# EAGLE board hw-proto01 (EAGLE 7.3.0)
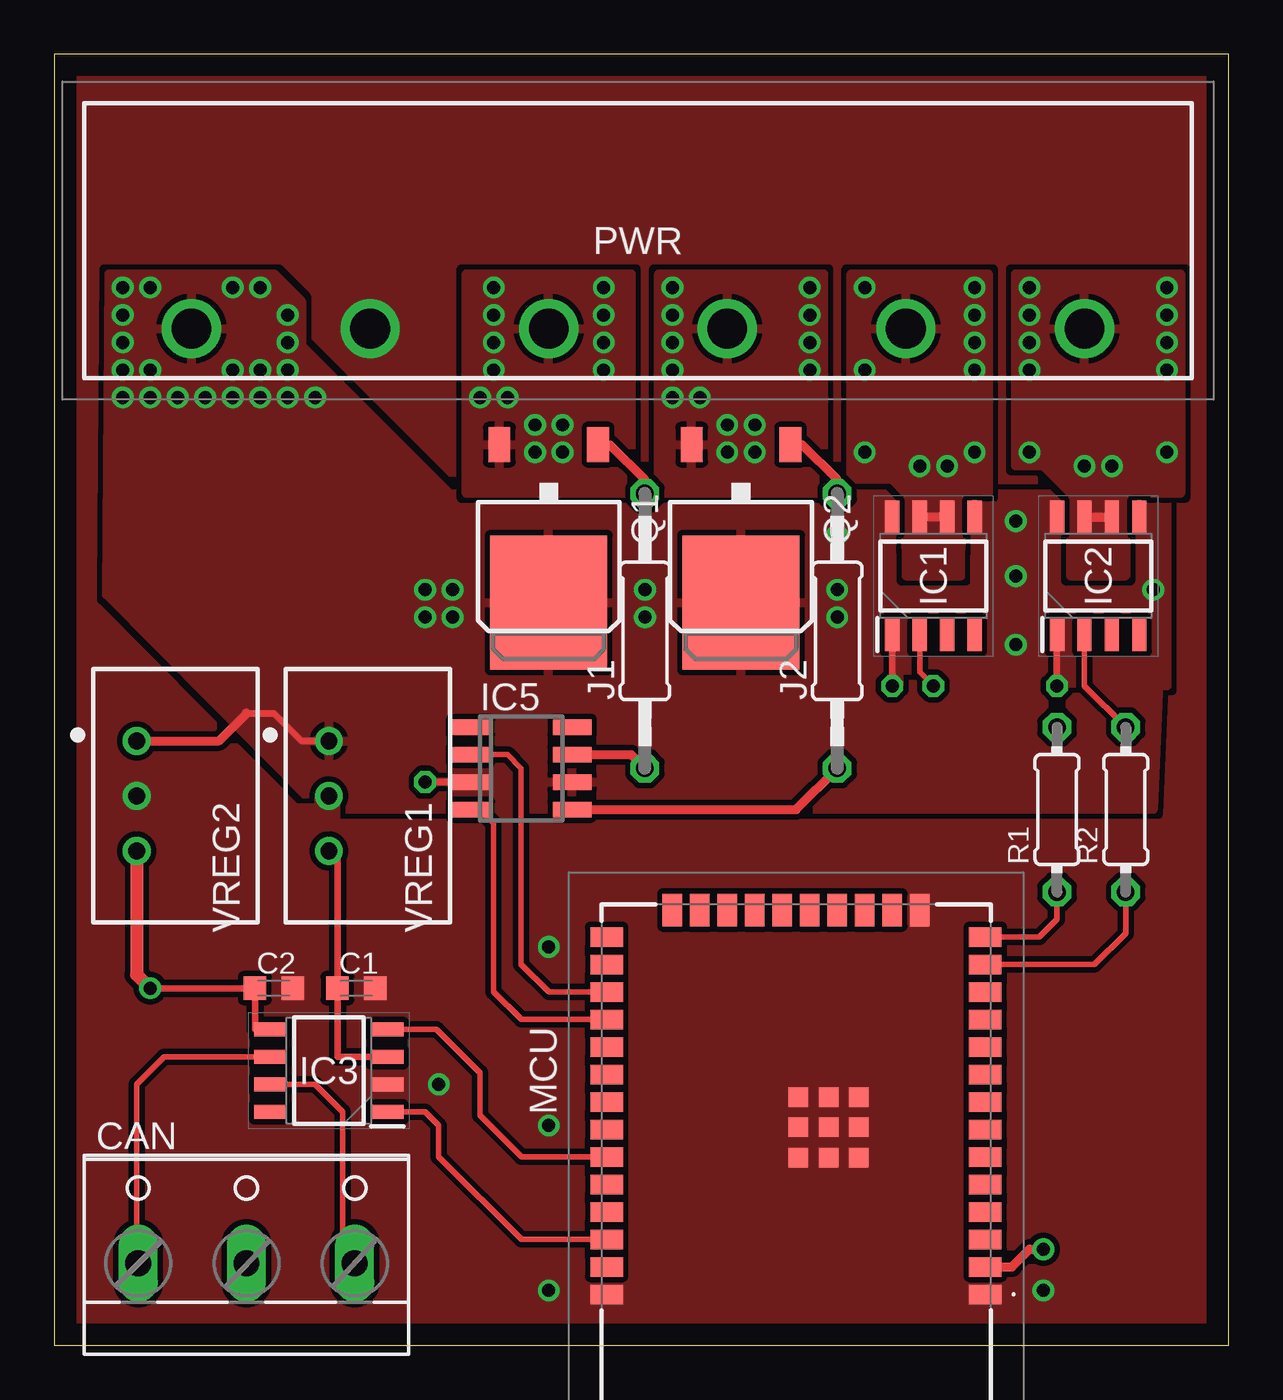
[diagram p0: board, top side]
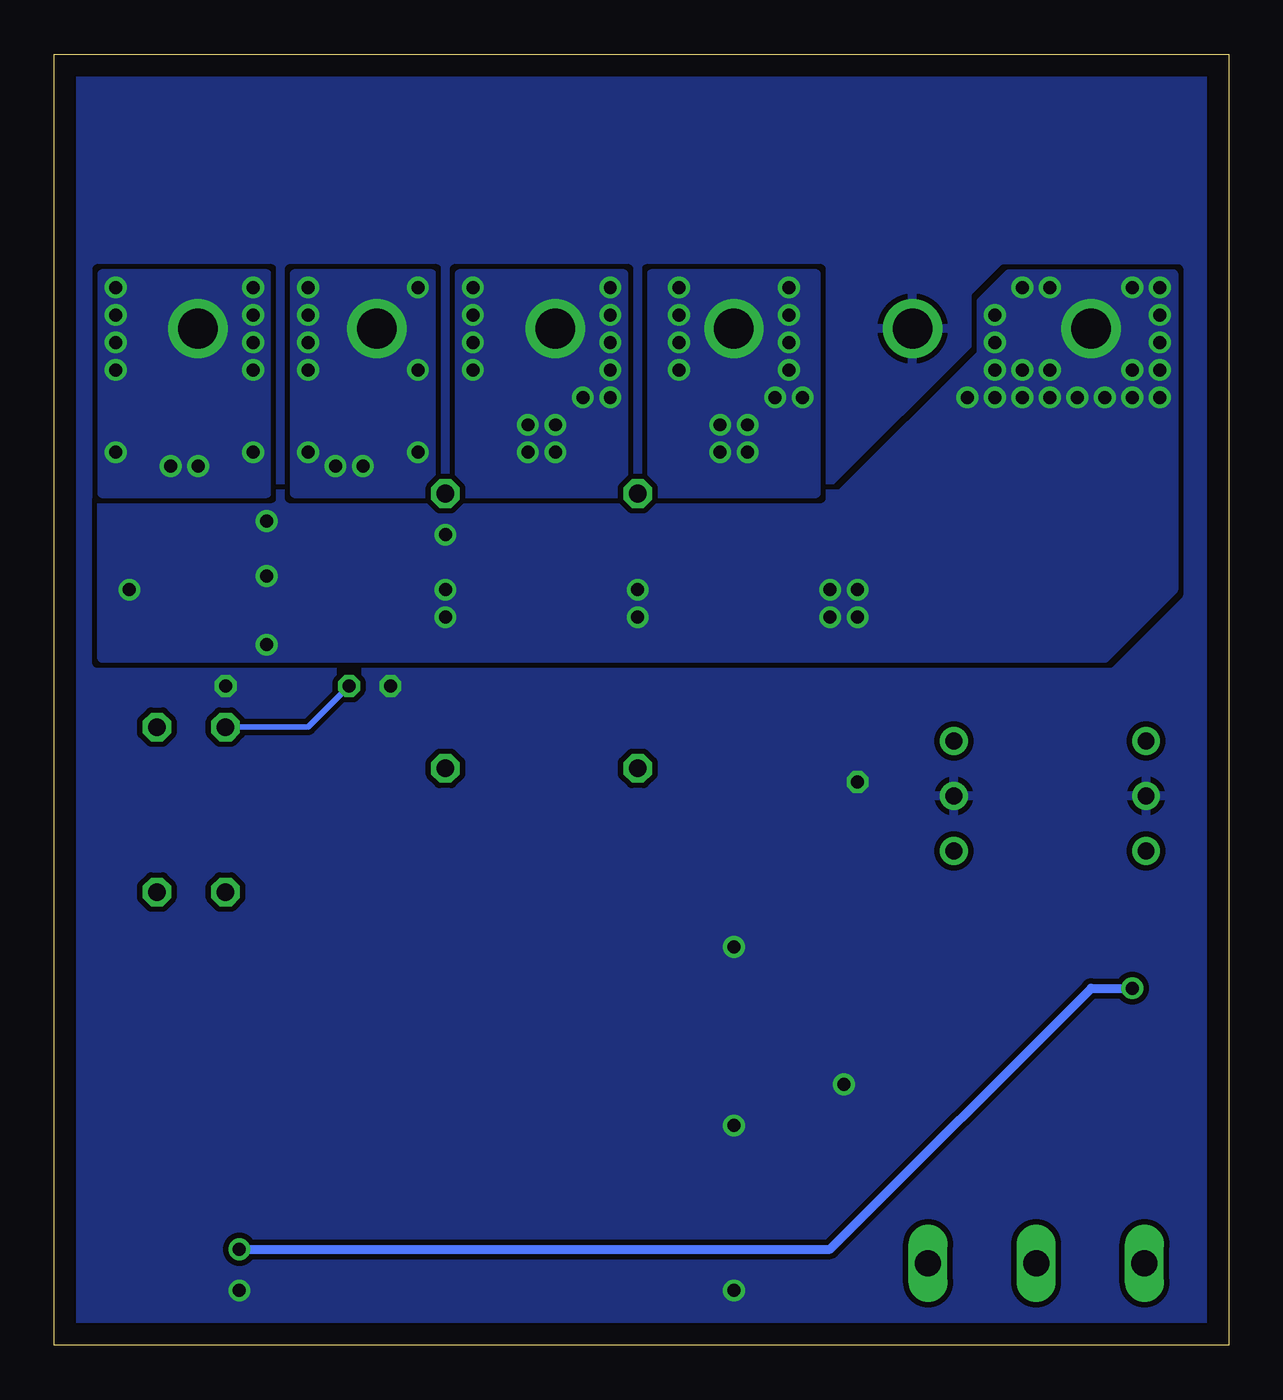
[diagram p1: board, bottom side, seen from below]

Size 54.28 x 59.68 mm. Coordinates in mm from the lower left corner, seen from the top.
Outline: 0,0 54.28,0 54.28,59.68 0,59.68 0,0
Copper layers (1*16): Top 0.035mm / dielectric 1.5mm / Bottom 0.035mm
Design rules "default": minimum track width 10mil, minimum drill 24mil, track to track 8mil, track to pad 8mil, pad to pad 8mil, via to via 8mil, smd to smd 8mil, copper to edge 40mil, drill to drill 8mil, minimum pad ring 10mil, minimum via ring 8mil, stop-mask expansion 4mil, vias tented up to drill 0mil, thermal gap 10mil

## Footprints (pad centres in the part's own frame; a part is rotated, then mirrored left to right if it is on the bottom)
C0603K = smd 1.05 x 1.08: 1 -0.875,0; 2 0.875,0
W237-103 = drill 1.194 long: 1 -5,-1.29; 2 0,-1.29; 3 5,-1.29
SOIC127P600X175-8N = smd 1.525 x 0.65: 1 -2.712,1.905; 2 -2.712,0.635; 3 -2.712,-0.635; 4 -2.712,-1.905; 5 2.712,-1.905; 6 2.712,-0.635; 7 2.712,0.635; 8 2.712,1.905
SOIC127P600X175-8N' = smd 1.5 x 0.65: 1 -2.7,1.905; 2 -2.7,0.635; 3 -2.7,-0.635; 4 -2.7,-1.905; 5 2.7,-1.905; 6 2.7,-0.635; 7 2.7,0.635; 8 2.7,1.905
SO08 = smd 0.72 x 1.78: 1 -1.905,-2.35; 2 -0.635,-2.35; 3 0.635,-2.35; 4 1.905,-2.35; 5 1.905,2.35; 6 0.635,2.35; 7 -0.635,2.35; 8 -1.905,2.35
0207/12 = drill 0.813 octagon: 1 -6.35,0; 2 6.35,0
ESP32WROOM32EN8R2 = smd 1.5 x 0.9: 1 -8.75,5.26; 2 -8.75,3.99; 3 -8.75,2.72; 4 -8.75,1.45; 5 -8.75,0.18; 6 -8.75,-1.09; 7 -8.75,-2.36; 8 -8.75,-3.63; 9 -8.75,-4.9; 10 -8.75,-6.17; 11 -8.75,-7.44; 12 -8.75,-8.71; 13 -8.75,-9.98; 14 -8.75,-11.25; 25 8.75,-11.25; 26 8.75,-9.98; 27 8.75,-8.71; 28 8.75,-7.44; 29 8.75,-6.17; 30 8.75,-4.9; 31 8.75,-3.63; 32 8.75,-2.36; 33 8.75,-1.09; 34 8.75,0.18; 35 8.75,1.45; 36 8.75,2.72; 37 8.75,3.99; 38 8.75,5.26 | smd 0.9 x 1.5: 15 -5.715,-12.5; 16 -4.445,-12.5; 17 -3.175,-12.5; 18 -1.905,-12.5; 19 -0.635,-12.5; 20 0.635,-12.5; 21 1.905,-12.5; 22 3.175,-12.5; 23 4.445,-12.5; 24 5.715,-12.5 | smd 0.9 x 0.9: 39 -1.5,-2.46; 40 -2.9,-2.46; 41 -2.9,-3.86; 42 -1.5,-3.86; 43 -0.1,-3.86; 44 -0.1,-2.46; 45 -0.1,-1.06; 46 -1.5,-1.06; 47 -2.9,-1.06
4DBP10806 = drill 1.829 pad 2.743: 1 0,0; 2 8.255,0; 3 16.51,0; 4 24.765,0; 5 33.02,0; 6 41.275,0
D-PAK_TO252AA = smd 1 x 1.6: 1 -2.28,-4.8; 3 2.28,-4.8 | smd 5.4 x 6.2: 4 0,2.5
0204/7 = drill 0.813 octagon: 1 -3.81,0; 2 3.81,0
TSR-1-2433 = drill 0.78 pad 1.28: 1 -2.54,0; 2 0,0; 3 2.54,0

## Placement (x,y rotation side)
C1  100n  [C0603K]  13.97,16.51 0 top
C2  100n  [C0603K]  10.16,16.51 0 top
CAN  [W237-103]  8.89,5.08 0 top
IC1  VN5E160MSTR-E  [SOIC127P600X175-8N]  40.64,35.56 90 top
IC2  VN5E160MSTR-E  [SOIC127P600X175-8N]  48.26,35.56 90 top
IC3  MCP2562T-H_SN  [SOIC127P600X175-8N']  12.7,12.7 180 top
IC5  IR4427S  [SO08]  21.59,26.67 270 top
J1  000  [0207/12]  27.3,33.02 90 top
J2  000  [0207/12]  36.2,33.02 90 top
MCU  ESP32-WROOM-32E  [ESP32WROOM32EN8R2]  34.29,7.62 180 top
PWR  4DB-P108-06  [4DBP10806]  6.35,46.99 0 top
Q1  PMOS  [D-PAK_TO252AA]  22.86,36.83 180 top
Q2  PMOS  [D-PAK_TO252AA]  31.75,36.83 180 top
R1  10K0  [0204/7]  46.35,24.77 90 top
R2  10K0  [0204/7]  49.53,24.77 90 top
VREG1  +5V  [TSR-1-2433]  12.7,25.4 270 top
VREG2  +3V3  [TSR-1-2433]  3.81,25.4 270 top

## Library data of the parts
C1 C2 J1 J2 R1 R2 = rcl
CAN = con-wago-500; MPN: 237-103; OC_FARNELL: unknown; OC_NEWARK: 18M7116
IC1 IC2 = VN5E160MSTR-E; DESCRIPTION: Gate Drivers SNGL CH HI-SIDE DRVR W/ANALOG CRRNT SNSE; HEIGHT: 1.75mm; MANUFACTURER_NAME: STMicroelectronics; MANUFACTURER_PART_NUMBER: VN5E160MSTR-E; MOUSER_PART_NUMBER: 511-VN5E160MSTR-E; MOUSER_PRICE-STOCK: https://www.mouser.co.uk/ProductDetail/STMicroelectronics/VN5E160MSTR-E?qs=WSSg0AwdCh77XxtxsYEeyw%3D%3D
IC3 = MCP2562T-H_SN; DESCRIPTION: CAN Interface IC; HEIGHT: 1.75mm; MANUFACTURER_NAME: Microchip; MANUFACTURER_PART_NUMBER: MCP2562T-H/SN; MOUSER_PART_NUMBER: 579-MCP2562T-H/SN; MOUSER_PRICE-STOCK: https://www.mouser.co.uk/ProductDetail/Microchip-Technology/MCP2562T-H-SN?qs=eTPcRhULBzwloCb8Xxk0jQ%3D%3D
IC5 = ir; MF: INTERNATIONAL RECTIFIER(IR); MPN: IR4427STRPBF; OC_FARNELL: 8639094; OC_NEWARK: 63J7933
MCU = ESP32-WROOM-32E-N8R2; DESCRIPTION: Multiprotocol Modules ESP32-WROOM-32E integrates ESP32-D0WD-V3, with higher stability and safety performance.; HEIGHT: 3.25mm; MANUFACTURER_NAME: Espressif Systems; MANUFACTURER_PART_NUMBER: ESP32-WROOM-32E-N8R2; MOUSER_PART_NUMBER: 356-ESP32WRM32EN8R2; MOUSER_PRICE-STOCK: https://www.mouser.co.uk/ProductDetail/Espressif-Systems/ESP32-WROOM-32E-N8R2?qs=By6Nw2ByBD0mvGJSS3Ohlw%3D%3D
PWR = 4DB-P108-06; DESCRIPTION: Dual Barrier, Printed Circuit Pin, Wire-to-Board, 6 Position, 8.26 mm [.325 in] Centerline, 1 Row, Buchanan 4DB Series, Barrier Strips; HEIGHT: 13.716mm; MANUFACTURER_NAME: TE Connectivity; MANUFACTURER_PART_NUMBER: 4DB-P108-06; MOUSER_PART_NUMBER: N/A; MOUSER_PRICE-STOCK: https://www.mouser.co.uk/ProductDetail/TE-Connectivity/4DB-P108-06?qs=JZD3Rbs9Xzm1xbyNfnCHaQ%3D%3D
Q1 Q2 = transistor-mosfet-specialpkg
VREG1 VREG2 = TSR_1-2433E; DESCRIPTION: 1 Amp POL converter, industrial, 6-36 VDC input, pos.-pos. circuit, cost efficient, LM78 compatible, SIP-3; HEIGHT: mm; MANUFACTURER_NAME: Traco Power; MANUFACTURER_PART_NUMBER: TSR 1-2433E; MOUSER_PART_NUMBER: 495-TSR1-2433E; MOUSER_PRICE-STOCK: https://www.mouser.co.uk/ProductDetail/TRACO-Power/TSR-1-2433E?qs=vmHwEFxEFR9haWIzn8wG3A%3D%3D

## Nets
+3V3: C2.1 IC3.5 MCU.2 VREG2.3
+5V: C1.1 IC3.3 VREG1.3
+12V: IC1.5 IC1.8 IC2.5 IC2.8 IC5.6 PWR.1 Q1.4 Q2.4 VREG1.1 VREG2.1
CAN_RX: IC3.4 MCU.33
CAN_TX: IC3.1 MCU.36
CTL1: IC5.2 MCU.27
CTL2: IC5.4 MCU.28
CTL3: MCU.14 R1.1
CTL4: MCU.13 R2.1
GND: C1.2 C2.2 IC1.1 IC2.1 IC3.2 IC5.3 MCU.1 MCU.15 MCU.38 MCU.39 MCU.40 MCU.41 MCU.42 MCU.43 MCU.44 MCU.45 MCU.46 MCU.47 PWR.2 VREG1.2 VREG2.2
N$1: CAN.3 IC3.7
N$2: CAN.1 IC3.6
N$3: IC5.5 J2.1
N$4: IC5.7 J1.1
N$5: J1.2 Q1.1
N$6: J2.2 Q2.1
N$7: IC1.2 R1.2
N$8: IC2.2 R2.2
SW1: PWR.3 Q1.3
SW2: PWR.4 Q2.3
SW3: IC1.6 IC1.7 PWR.5
SW4: IC2.6 IC2.7 PWR.6

## Tracks (layer width: path | path; a pad name or v marks a point on that pad's centre or on a via)
+3V3  (via drill 0.6)
  Top 0.305: v4.45,16.51 C2.1 9.29,14.6 IC3.5
  Top 0.406: MCU.2 44.27,3.63 45.09,4.45 v45.72,4.45
  Top 0.61: VREG2.3 3.81,17.15 v4.45,16.51
  Bottom 0.406: v45.72,4.45 18.41,4.45 6.35,16.51 v4.45,16.51
+5V
  Top 0.305: IC3.3 13.1,13.34 C1.1 13.1,22.46 VREG1.3
+12V  (via drill 0.6)
  Top 0.305: 8.89,29.21 10.16,29.21 11.43,27.94 VREG1.1
  Top 0.406: VREG2.1 7.62,27.94 8.89,29.21
  other vias: 3.17,48.9 4.45,48.9 8.26,48.9 9.53,48.9 10.79,47.62 10.79,46.35 3.17,47.62 3.17,46.35 3.17,45.09 4.45,45.09 8.26,45.09 9.53,45.09 10.79,45.09 27.3,33.66 27.3,34.92 36.2,34.92 36.2,33.66 18.41,34.92 18.41,33.66 17.14,33.66 17.14,34.92 44.45,35.56 44.45,32.38 44.45,38.1 50.8,34.92 3.17,43.82 4.45,43.82 5.71,43.82 6.99,43.82 8.26,43.82 9.53,43.82 10.79,43.82 12.06,43.82 36.2,37.46
  pour Top (isolate 0.254, rank 4): 2.54,49.53 10.16,49.53 11.43,48.26 11.43,46.21 18.27,39.37 51.44,39.37 50.8,24.77 12.27,24.77 2.42,34.69
  pour Top (isolate 0.254, rank 4, no thermals): 35.56,39.37 51.44,39.37 51.44,30.48 35.56,30.48
  pour Bottom (isolate 0.254, rank 4, no thermals): 2.54,49.53 2.54,34.92 5.71,31.75 52.07,31.75 52.07,39.37 17.91,39.37 11.43,45.85 11.43,48.26 10.16,49.53
CAN_RX
  Top 0.254: MCU.33 21.6,8.71 19.68,10.62 19.68,12.6 17.68,14.6 IC3.4
CAN_TX
  Top 0.254: IC3.1 17.14,10.79 17.78,10.16 17.78,8.71 21.59,4.9 MCU.36
CTL1
  Top 0.254: MCU.27 22.87,16.33 21.59,17.61 21.59,26.67 20.95,27.3 IC5.2
CTL2
  Top 0.254: IC5.4 19.68,24.77 20.32,24.13 20.32,16.34 21.6,15.06 MCU.28
CTL3
  Top 0.254: MCU.14 45.54,18.87 46.35,19.69 R1.1
CTL4
  Top 0.254: MCU.13 48.08,17.6 49.53,19.05 R2.1
GND  (via drill 0.6)
  Top 0.305: IC1.1 v38.73,30.48 | IC2.1 v46.35,30.48 | IC5.3 v17.14,26.03
  other vias: 17.78,12.06 22.86,10.16 22.86,18.41 22.86,2.54 45.72,2.54
  pour Bottom (isolate 0.254, rank 6): 0,59.69 54.61,59.69 54.61,0 0,0
  pour Top (isolate 0.254, rank 6, no thermals): 0,59.69 54.61,59.69 54.61,0 0,0
N$1
  Top 0.254: IC3.7 12.06,12.06 13.34,10.79 13.34,4.34 CAN.3
N$2
  Top 0.254: IC3.6 5.08,13.34 3.81,12.06 3.81,3.87 CAN.1
N$3
  Top 0.406: IC5.5 34.29,24.77 J2.1
N$4
  Top 0.406: IC5.7 26.67,27.3 J1.1
N$5
  Top 0.406: J1.2 27.3,40.01 25.68,41.63 Q1.1
N$6
  Top 0.406: Q2.1 34.57,41.63 36.2,40.01 J2.2
N$7  (via drill 0.6)
  Top 0.254: IC1.2 40.01,31.12 v40.64,30.48
  Bottom 0.254: v40.64,30.48 42.55,28.58 R1.2
N$8
  Top 0.254: R2.2 47.62,30.48 IC2.2
SW1  (via drill 0.6)
  other vias: 22.23,42.55 22.23,41.27 20.32,45.09 20.32,46.35 20.32,47.62 20.32,48.9 25.4,48.9 25.4,47.62 25.4,46.35 25.4,45.09 19.68,43.82 20.95,43.82 23.5,41.27 23.5,42.55
  pour Top (isolate 0.254, rank 3): 19.05,49.53 26.67,49.53 26.67,39.37 19.05,39.37
  pour Bottom (isolate 0.254, rank 2, no thermals): 19.05,49.53 26.67,49.53 26.67,39.37 19.05,39.37
SW2  (via drill 0.6)
  other vias: 28.57,48.9 28.57,47.62 28.57,46.35 28.57,45.09 31.11,42.55 31.11,41.27 34.92,48.9 34.92,47.62 34.92,46.35 34.92,45.09 28.57,43.82 29.84,43.82 32.38,41.27 32.38,42.55
  pour Top (isolate 0.254, rank 3): 27.94,49.53 35.56,49.53 35.56,39.37 27.94,39.37
  pour Bottom (isolate 0.254, rank 2, no thermals): 27.94,49.53 35.56,49.53 35.56,39.37 27.94,39.37
SW3  (via drill 0.6)
  Top 0.406: IC1.6 IC1.7
  other vias: 37.47,48.9 42.55,48.9 42.55,47.62 42.55,46.35 42.55,45.09 37.47,45.09 37.47,41.27 42.55,41.27 40.01,40.64 41.27,40.64
  pour Top (isolate 0.254, rank 2): 39.37,36.83 39.37,39.37 38.73,40.01 36.83,40.01 36.83,49.53 43.18,49.53 43.18,39.37 41.91,39.37 41.91,36.83
  pour Top (isolate 0.254, rank 2, no thermals): 39.37,39.37 39.37,35.56 41.91,35.56 41.91,39.37
  pour Bottom (isolate 0.254, rank 2, no thermals): 36.83,49.53 43.18,49.53 43.18,39.37 36.83,39.37
SW4  (via drill 0.6)
  Top 0.406: IC2.7 IC2.6
  other vias: 45.09,48.9 51.44,48.9 51.44,47.62 51.44,46.35 51.44,45.09 45.09,45.09 45.09,46.35 45.09,47.62 45.09,41.27 47.62,40.64 48.9,40.64 51.44,41.27
  pour Top (isolate 0.254, rank 2, no thermals): 46.99,39.37 46.99,35.56 49.53,35.56 49.53,39.37
  pour Top (isolate 0.254, rank 2): 46.99,35.56 46.99,39.37 45.72,40.64 44.45,40.64 44.45,49.53 52.07,49.53 52.07,39.37 49.53,39.37 49.53,35.56
  pour Bottom (isolate 0.254, rank 2, no thermals): 44.45,49.53 52.07,49.53 52.07,39.37 44.45,39.37